# Altium PCB MPU9250-PCB.PcbDoc
Units mm, origin at the board's own origin, x right, y up, seen from the top; angles counter-clockwise.
Board outline 7.15 x 9.48 mm, 2 copper layers (Top Layer, Bottom Layer); 14 components, 10 nets, 60 pads, 16 vias.
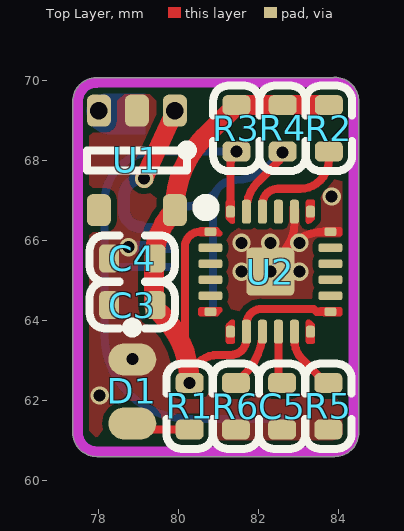
[diagram p0: Top Layer view]
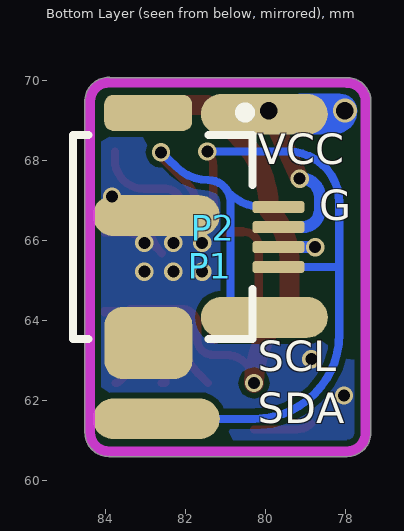
[diagram p1: Bottom Layer view, seen from below]
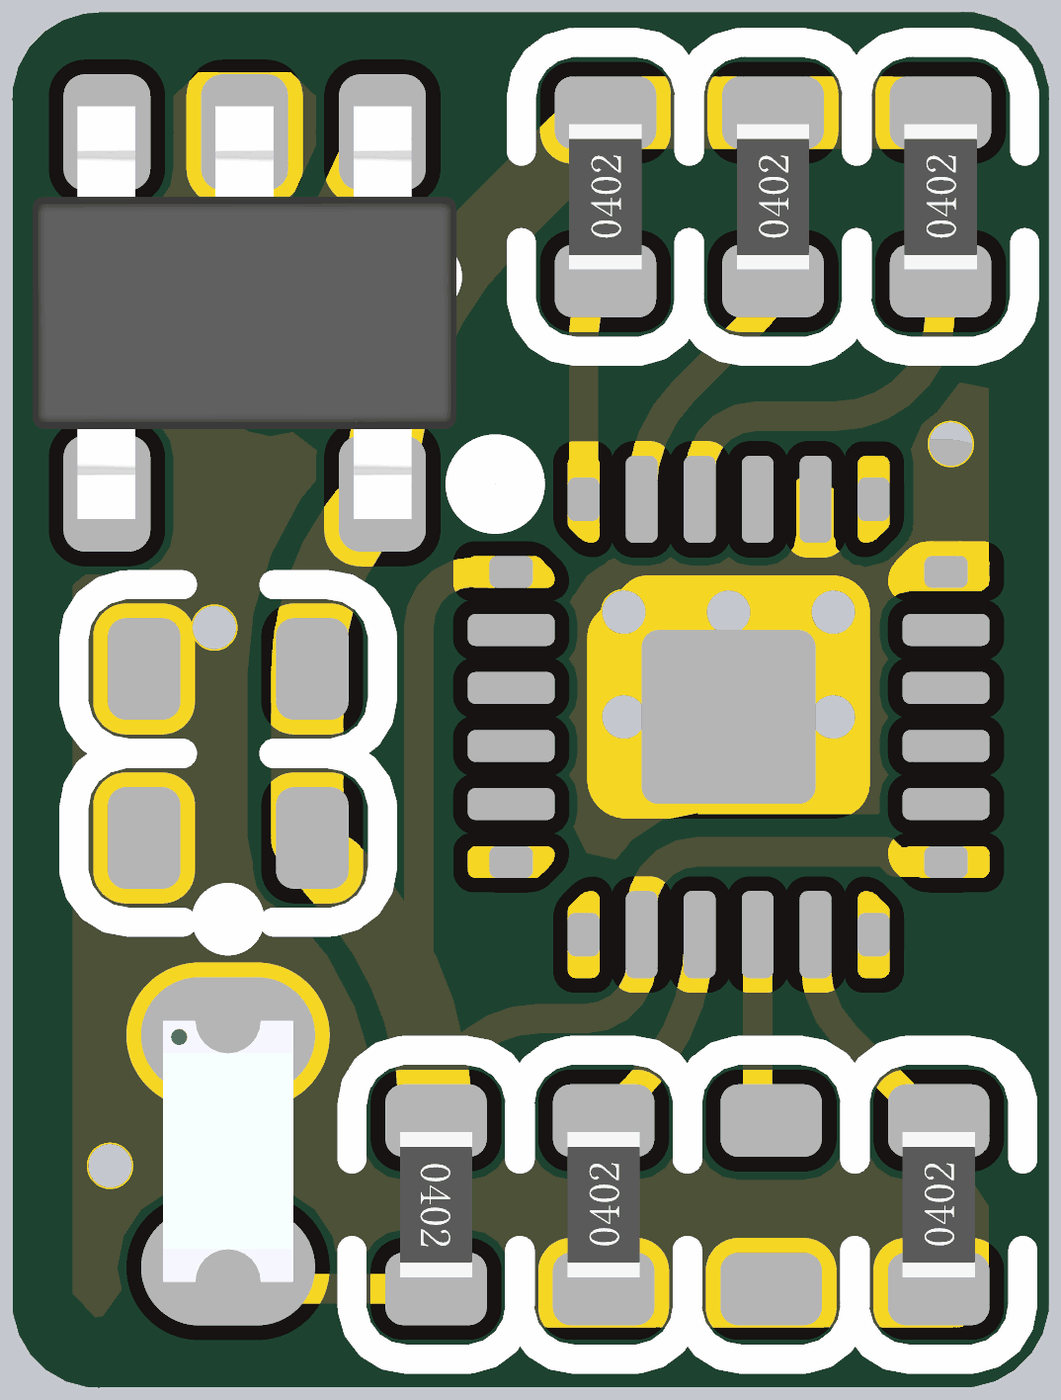
[diagram p2: 3D render of the assembled board from above, using the file's embedded part models]

## Layer stack, top to bottom
Top Solder: solder mask 0.0102, Solder Resist, Dk 3.5
Top Layer: signal copper 0.0356
Dielectric 1: dielectric 0.32, FR-4, Dk 4.8
Bottom Layer: signal copper 0.0356
Bottom Solder: solder mask 0.0102, Solder Resist, Dk 3.5

## Board outline
77.368,61.193 cw(c77.495,61.199) 77.368,61.199 77.368,69.47 cw(c77.495,69.48) 77.368,69.48 cw(c77.964,69.48) 77.938,70.076 cw(c77.964,69.952) 77.964,70.079 83.885,70.079 cw(c83.885,69.952) 83.89,70.079 cw(c83.92,69.955) 83.92,70.082 cw(c83.92,69.486) 84.517,69.486 cw(c84.389,69.486) 84.516,69.469 84.516,61.201 cw(c83.919,61.201) 83.919,60.604 cw(c83.919,60.731) 83.901,60.605 cw(c83.884,60.731) 83.884,60.604 77.984,60.604 cw(c77.965,60.73) 77.965,60.603 cw(c77.965,61.199)

## Design rules (kind name [scope] priority, off if disabled: settings)
Clearance [All] p1: gap=0.152
HoleSize [All] p1: absolutevalues=TRUE maxlimit=25.375 minlimit=0.025 maxpercent=80.000 minpercent=20.000
HoleToHoleClearance [All] p1: gap=0.203 allowstackedmicrovias=TRUE
MinimumSolderMaskSliver [All] p1: minsoldermaskwidth=0
PolygonConnect [All] p1: connectstyle=Direct reliefconductorwidth=0.254 reliefentries=4 polygonreliefangle="90 Angle" airgapwidth=0.254
RoutingVias [All] p1: holewidth=0.711 width=1.27 viastyle="Through Hole" minholewidth=0.711 minwidth=1.27 maxholewidth=0.711 maxwidth=1.27
SilkToSilkClearance [All] p1: silktosilkclearance=0
SilkToSolderMaskClearance [IsPad] p1: minsilkscreentomaskgap=0 clearancetoexposedcopper=TRUE
SolderMaskExpansion [All] p1: expansion=0.102
Width [All] p1: maxlimit=999 minlimit=0.2 preferedwidth=0.203
25 further rules are at their usual default settings.

## Components (designator, comment, footprint, x,y, rotation, side; value= is the part's Value field where it differs from the comment)
C3 "104" 1__0402-CAP(有丝印) 78.855,64.39 r0 top
C4 "103" 1__0402-CAP(有丝印) 78.855,65.555 r0 top
C5 "104" 1__0402-CAP(有丝印) 82.601,61.862 r90 top
D1 "LED" 1__0603-LED_ 78.854,62.23 r90 top
P1 "Header 4" 1__排针_贴片单_4P两侧 81.38,65.355 r270 bottom
P2 "Header 4" "1__FPC 4P (临时用)" 81.305,66.09 r90 bottom
R1 "4K7" 1__0402-RES(有丝印) 80.289,61.862 r270 top
R2 "10K" 1__0402-RES(有丝印) 83.769,68.809 r90 top
R3 "10K" 1__0402-RES(有丝印) 81.458,68.809 r90 top
R4 "10K" 1__0402-RES(有丝印) 82.614,68.809 r90 top
R5 "10K" 1__0402-RES(有丝印) 83.757,61.862 r90 top
R6 "10K" 1__0402-RES(有丝印) 81.445,61.862 r90 top
U1 "RT9193-33" 1__SOT23-5 78.969,68.008 r270 top
U2 "MPU9250" "1__QFN3*3 (改)" 82.307,65.224 r0 top

## Footprints (in the part's own frame and the unit in brackets; to place one, negate y for a bottom-side part, rotate by r counter-clockwise, add the part's x,y. Pads: shape width x height; smd on the part's side, far side on the other; paste and mask are expansions set on the pad)
1__0402-CAP(有丝印) [mm]
  rrect50% 0.5x0.7 smd: 1(-0.58,0) 2(0.58,0)
  silkscreen extent -1.06,-0.58 1.06,0.58, body extent -0.55,-0.3 0.55,0.3, height 0.6
1__0402-RES(有丝印) [mm]
  rrect50% 0.5x0.7 smd: 1(-0.58,0) 2(0.58,0)
  silkscreen extent -1.06,-0.58 1.06,0.58, body extent -0.5,-0.25 0.5,0.25, height 0.35
1__0603-LED_ [mm]
  oval 0.8x1.2 smd: 1(-0.8,0) 2(0.8,0)
  silkscreen extent 1.48,-0.13 1.72,0.12, body extent -0.9,-0.45 0.9,0.45, height 0.8
"1__FPC 4P (临时用)" [mm]
  rrect50% 0.3x1.3 smd: 1(0.75,-1.625) 2(0.25,-1.625) 3(-0.25,-1.625) 4(-0.75,-1.625)
  rrect50% 0.9x2.2 smd: 25(3.105,1.63)
  rrect50% 1.8x2.2 smd: 26(-2.65,1.625)
  silkscreen extent -2.55,-0.97 3.24,3.51
"1__QFN3*3 (改)" [mm]
  rrect50% 0.3x0.22 smd: 1(-1.5,1) 6(-1.5,-1) 13(1.5,-1) 18(1.5,1)
  rrect50% 0.6x0.22 smd: 2(-1.5,0.6) 3(-1.5,0.2) 4(-1.5,-0.2) 5(-1.5,-0.6) 14(1.5,-0.6) 15(1.5,-0.2) 16(1.5,0.2) 17(1.5,0.6)
  rrect50% 0.22x0.3 smd: 7(-1,-1.5) 12(1,-1.5) 19(1,1.5) 24(-1,1.5)
  rrect50% 0.22x0.6 smd: 8(-0.6,-1.5) 9(-0.2,-1.5) 10(0.2,-1.5) 11(0.6,-1.5) 20(0.6,1.5) 21(0.2,1.5) 22(-0.2,1.5) 23(-0.6,1.5)
  rrect20% 1.2x1.2 smd: 18(0,0)
  Top Layer region: -1.8,-0.945 -1.796,-0.924 -1.784,-0.906 -1.766,-0.894 -1.745,-0.89 -1.745,-0.89 -1.255,-0.89 -1.234,-0.894 -1.216,-0.906 -1.204,-0.924 -1.2,-0.945 -1.2,-0.945 -1.209,-0.991 -1.235,-1.03 -1.235,-1.03 -1.301,-1.096 -1.317,-1.106 -1.335,-1.11 -1.335,-1.11 -1.745,-1.11 -1.766,-1.106 -1.784,-1.094 -1.796,-1.076 -1.8,-1.055 -1.8,-1.055
  Top Layer region: -0.945,-1.8 -0.924,-1.796 -0.906,-1.784 -0.894,-1.766 -0.89,-1.745 -0.89,-1.745 -0.89,-1.255 -0.894,-1.234 -0.906,-1.216 -0.924,-1.204 -0.945,-1.2 -0.945,-1.2 -0.991,-1.209 -1.03,-1.235 -1.03,-1.235 -1.096,-1.301 -1.106,-1.317 -1.11,-1.335 -1.11,-1.335 -1.11,-1.745 -1.106,-1.766 -1.094,-1.784 -1.076,-1.796 -1.055,-1.8 -1.055,-1.8
  Top Layer region: -1.8,0.945 -1.796,0.924 -1.784,0.906 -1.766,0.894 -1.745,0.89 -1.745,0.89 -1.255,0.89 -1.234,0.894 -1.216,0.906 -1.204,0.924 -1.2,0.945 -1.2,0.945 -1.209,0.991 -1.235,1.03 -1.235,1.03 -1.301,1.096 -1.317,1.106 -1.335,1.11 -1.335,1.11 -1.745,1.11 -1.766,1.106 -1.784,1.094 -1.796,1.076 -1.8,1.055 -1.8,1.055
  Top Layer region: -0.945,1.8 -0.924,1.796 -0.906,1.784 -0.894,1.766 -0.89,1.745 -0.89,1.745 -0.89,1.255 -0.894,1.234 -0.906,1.216 -0.924,1.204 -0.945,1.2 -0.945,1.2 -0.991,1.209 -1.03,1.235 -1.03,1.235 -1.096,1.301 -1.106,1.317 -1.11,1.335 -1.11,1.335 -1.11,1.745 -1.106,1.766 -1.094,1.784 -1.076,1.796 -1.055,1.8 -1.055,1.8
  Top Layer region: 1.8,0.945 1.796,0.924 1.784,0.906 1.766,0.894 1.745,0.89 1.745,0.89 1.255,0.89 1.234,0.894 1.216,0.906 1.204,0.924 1.2,0.945 1.2,0.945 1.209,0.991 1.235,1.03 1.235,1.03 1.301,1.096 1.317,1.106 1.335,1.11 1.335,1.11 1.745,1.11 1.766,1.106 1.784,1.094 1.796,1.076 1.8,1.055 1.8,1.055
  Top Layer region: 0.945,1.8 0.924,1.796 0.906,1.784 0.894,1.766 0.89,1.745 0.89,1.745 0.89,1.255 0.894,1.234 0.906,1.216 0.924,1.204 0.945,1.2 0.945,1.2 0.991,1.209 1.03,1.235 1.03,1.235 1.096,1.301 1.106,1.317 1.11,1.335 1.11,1.335 1.11,1.745 1.106,1.766 1.094,1.784 1.076,1.796 1.055,1.8 1.055,1.8
  Top Layer region: 1.8,-0.945 1.796,-0.924 1.784,-0.906 1.766,-0.894 1.745,-0.89 1.745,-0.89 1.255,-0.89 1.234,-0.894 1.216,-0.906 1.204,-0.924 1.2,-0.945 1.2,-0.945 1.209,-0.991 1.235,-1.03 1.235,-1.03 1.301,-1.096 1.317,-1.106 1.335,-1.11 1.335,-1.11 1.745,-1.11 1.766,-1.106 1.784,-1.094 1.796,-1.076 1.8,-1.055 1.8,-1.055
  Top Layer region: 0.945,-1.8 0.924,-1.796 0.906,-1.784 0.894,-1.766 0.89,-1.745 0.89,-1.745 0.89,-1.255 0.894,-1.234 0.906,-1.216 0.924,-1.204 0.945,-1.2 0.945,-1.2 0.991,-1.209 1.03,-1.235 1.03,-1.235 1.096,-1.301 1.106,-1.317 1.11,-1.335 1.11,-1.335 1.11,-1.745 1.106,-1.766 1.094,-1.784 1.076,-1.796 1.055,-1.8 1.055,-1.8
  silkscreen extent -1.82,1.39 -1.39,1.82
1__SOT23-5 [mm]
  rrect50% 0.8x0.6 smd: 1(-1.245,0.95) 2(-1.245,0) 3(-1.245,-0.95) 4(1.245,-0.95) 5(1.245,0.95)
  silkscreen extent -0.37,-1.25 0.25,1.38, body extent -1.42,-1.46 1.42,1.46
1__排针_贴片单_4P两侧 [mm]
  oval 1.02x3.17 smd: 1(-3.807,1.35) 2(-1.272,-1.35) 3(1.273,1.35) 4(3.808,-1.35)

## Part data
C3 C4 C5: library part Cap, "Capacitor"
D1: library part LED0, "Typical INFRARED GaAs LED"
P1 P2: "Header, 4-Pin"
R1 R2 R3 R4 R5 R6: library part Res2, "Resistor"
U1: "3.3V超低压差LDO"

## Via types
v1: diameter 0.46, hole 0.3, Top Layer to Bottom Layer, tented both sides, 14 vias
v2: diameter 0.6, hole 0.44, Top Layer to Bottom Layer, tented both sides, 2 vias

## Nets (pads, with @x,y where several pads share a name; then routed paths per layer and width w, separated by ;. In a path a pad name is that pad's centre, name@x,y a point inside that pad or via, vN(x,y) a via of type N, cw(c..) or ccw(c..) an arc to the next point about the centre after c; other vN are vias at no path point)
3V3: C3.2 C4.2 R1.1 R2.2 R3.2 R4.2 U1.5 U2.1 U2.8 U2.13 | length 18.5
  Top Layer w0.203: C3.2@79.355,64.39 C3.2@79.572,64.173 ; U1.5 U1.5@79.919,66.797 ; 80.17,63.197 80.17,65.845 cw(c80.549,65.845) 80.549,66.224 U2.1 ; v1(80.289,62.442) cw(c80.992,62.442) 80.992,63.144 81.318,63.144 ccw(c81.318,63.534) 81.707,63.534 U2.8 81.707,63.907 cw(c82.095,63.907) 82.095,64.295 83.39,64.295 83.462,64.224 U2.13
  Top Layer w0.5: C3.2@79.4,64.39 79.4,65.511 cw(c81.171,65.511) U1.5 ; C3.2@79.572,64.173 cw(c77.842,62.442) 80.17,63.197 cw(c77.842,62.442) v1(80.289,62.442) ; U1.5@79.919,66.797 cw(c82.459,66.797) 80.663,68.593 R3.2 R4.2 R2.2
GND: C3.1 C4.1 C5.1 D1.2 P1.2 P2.3 P2.26 R5.1 R6.1 U1.2 U2.18 U2.20 | length 3.5
  Top Layer w0.203: U2.20 82.907,66.44 cw(c81.843,66.44) 82.596,65.687 82.745,65.836 cw(c83.681,64.9) 83.681,66.224 U2.18@83.807,66.224
  Bottom Layer w0.203: v1(78.76,65.84) v1@78.76,65.845
  Bottom Layer w0.3: v1@78.76,65.845 P2.3@79.78,65.845
  other v1: 78.04,62.13 78.854,63.037 81.585,65.224 82.307,65.224 83.03,65.224 81.585,65.946 82.307,65.946 83.03,65.946 83.84,67.105
NetC5_2: C5.2 U2.10 | length 1.4
  Top Layer w0.203: U2.10 82.507,62.442 C5.2
NetD1_1: D1.1 R1.2 | length 1.5
  Top Layer w0.203: D1.1 ccw(c79.212,61.788) 79.212,61.282 R1.2
NetR2_1: R2.1 U2.22 | length 2.7
  Top Layer w0.203: U2.22 82.107,66.905 cw(c82.499,66.905) 82.499,67.297 83.045,67.297 ccw(c83.045,68.021) 83.769,68.021 R2.1
NetR5_2: R5.2 U2.11 | length 1.6
  Top Layer w0.203: U2.11 82.907,63.517 ccw(c83.595,63.517) 83.109,63.03 83.655,62.484 ccw(c83.757,62.585) R5.2
NetR6_2: R6.2 U2.9 | length 1.5
  Top Layer w0.203: R6.2 81.669,62.665 ccw(c80.61,63.724) U2.9
SCL: P1.3 P2.1 R4.1 U2.23 | length 8.3
  Top Layer w0.203: U2.23 81.707,66.775 cw(c82.685,66.775) 81.994,67.467 82.513,67.986 ccw(c82.27,68.229) R4.1 82.616,68.226 82.616,68.225 v1(82.616,68.207) R4.1@82.616,68.077
  Bottom Layer w0.203: P2.1@79.78,66.845 80.082,66.845 ccw(c80.082,68.042) 80.928,67.196 ; P1.3@80.874,64.211 80.874,66.954 cw(c81.432,66.954) 80.928,67.196 ; v1(82.616,68.207) 82.227,67.842 cw(c81.432,68.637) 81.432,67.513 ccw(c81.432,66.954) 80.928,67.196
SDA: P1.4 P2.4 R3.1 U2.24 | length 16.3
  Top Layer w0.203: U2.24 81.307,67.865 cw(c81.821,67.865) v1(81.458,68.229)
  Bottom Layer w0.203: P2.4@79.78,65.345 78.157,65.345 ; v1(81.458,68.229) 79.435,68.229 ccw(c79.435,66.951) 78.157,66.951 78.157,65.345 ; P1.4@82.808,61.547 80.276,61.547 cw(c80.276,63.665) 78.157,63.665 78.157,65.345
VCC: P1.1 P2.2 U1.1 U1.3 | length 4.4
  Top Layer w0.203: U1.3@78.019,69.225 v2(78.019,69.253) ; U1.1@79.919,69.225 v2(79.919,69.253)
  Top Layer w0.46: v1(79.15,67.55) U1.1@79.919,69.225
  Bottom Layer w0.203: P2.2@79.075,66.34 P2.2 ; v1@79.095,67.55 v1(79.15,67.55) ; P2.2@79.68,66.345 P2.2@79.78,66.345
  Bottom Layer w0.3: P2.2@79.075,66.34 cw(c79.075,66.77) 78.645,66.77 78.645,67.1 cw(c79.095,67.1) v1@79.095,67.55
pads on no net: P2.25 U1.4 U2.2 U2.3 U2.4 U2.5 U2.6 U2.7 U2.12 U2.14 U2.15 U2.16 U2.17 U2.19 U2.21

## Polygon pours and split planes (outlines as drawn)
GND on Top Layer "GND_L01_P000" (solid, remove dead copper, pour order 0): 77.964,69.952 83.888,69.952 cw(c83.888,69.486) 84.354,69.486 84.354,61.201 cw(c83.884,61.201) 83.884,60.731 77.963,60.731 cw(c77.963,61.199) 77.495,61.199 77.495,69.483 cw(c77.964,69.483) 77.964,69.952
GND on Bottom Layer "GND_L02_P002" (solid, remove dead copper, pour order 2): 77.964,69.952 83.888,69.952 cw(c83.888,69.486) 84.354,69.486 84.354,61.202 cw(c83.884,61.202) 83.884,60.731 77.963,60.731 cw(c77.963,61.199) 77.495,61.199 77.495,69.48 cw(c77.964,69.48) 77.964,69.949

## Keep-outs
Keep-Out Layer:
  lines w0.254: 77.964,69.949 ccw(c77.964,69.48) 77.495,69.48 77.495,61.199 ccw(c77.965,61.199) 77.965,60.73 ; 77.964,69.952 83.885,69.952 ; 77.965,60.731 83.884,60.731 ; 83.919,60.731 ccw(c83.919,61.201) 84.388,61.201 84.388,69.486 ccw(c83.92,69.486) 83.92,69.955

## Other copper
Bottom Layer:
  region net VCC: 79.175,69.67 78.13,69.67 ccw(c78.13,69.25) 77.71,69.25 ccw(c78.305,69.25) 78.305,68.655 79.175,68.655

## Silkscreen, mask and mechanical layers (free items; w line width, h text height)
Bottom Overlay:
  text "VCC" at 80.19,67.66 h1.3
  text "G" at 78.655,66.255 h1.3
  text "SCL" at 80.19,62.48 h1.3
  text "SDA" at 80.19,61.19 h1.3